# Altium PCB SSR output.PcbDoc
Units mil, origin at the board's own origin, x right, y up, seen from the top; angles counter-clockwise.
Board outline 3421 x 1967 mil, 4 copper layers (Top Layer, Internal Plane 1, Mid-Layer 1, Bottom Layer); 106 components, 73 nets, 419 pads, 0 vias.
Unrouted connection lines stored in the file: 129.
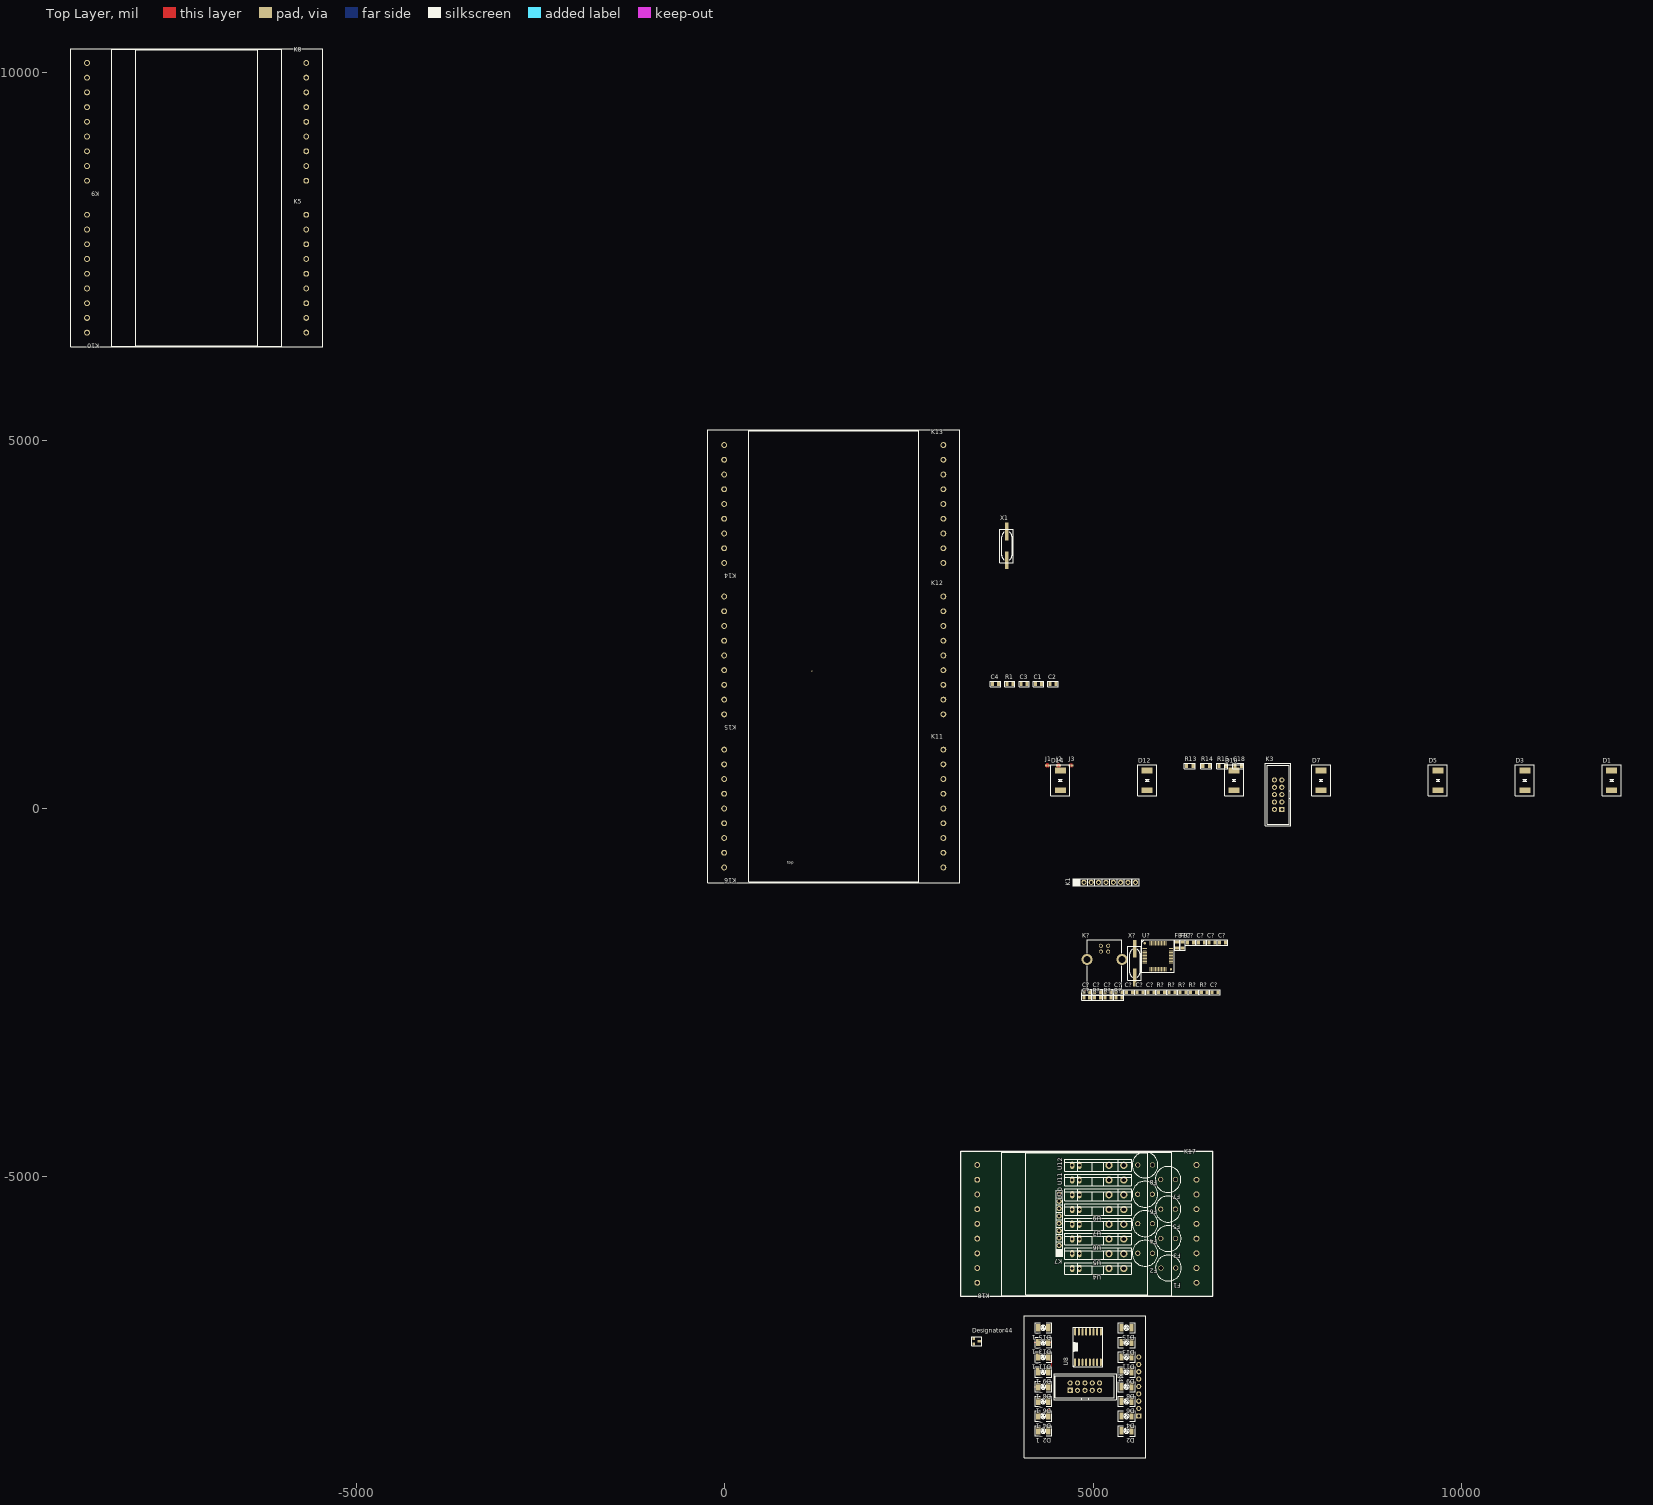
[diagram p0: Top Layer view]
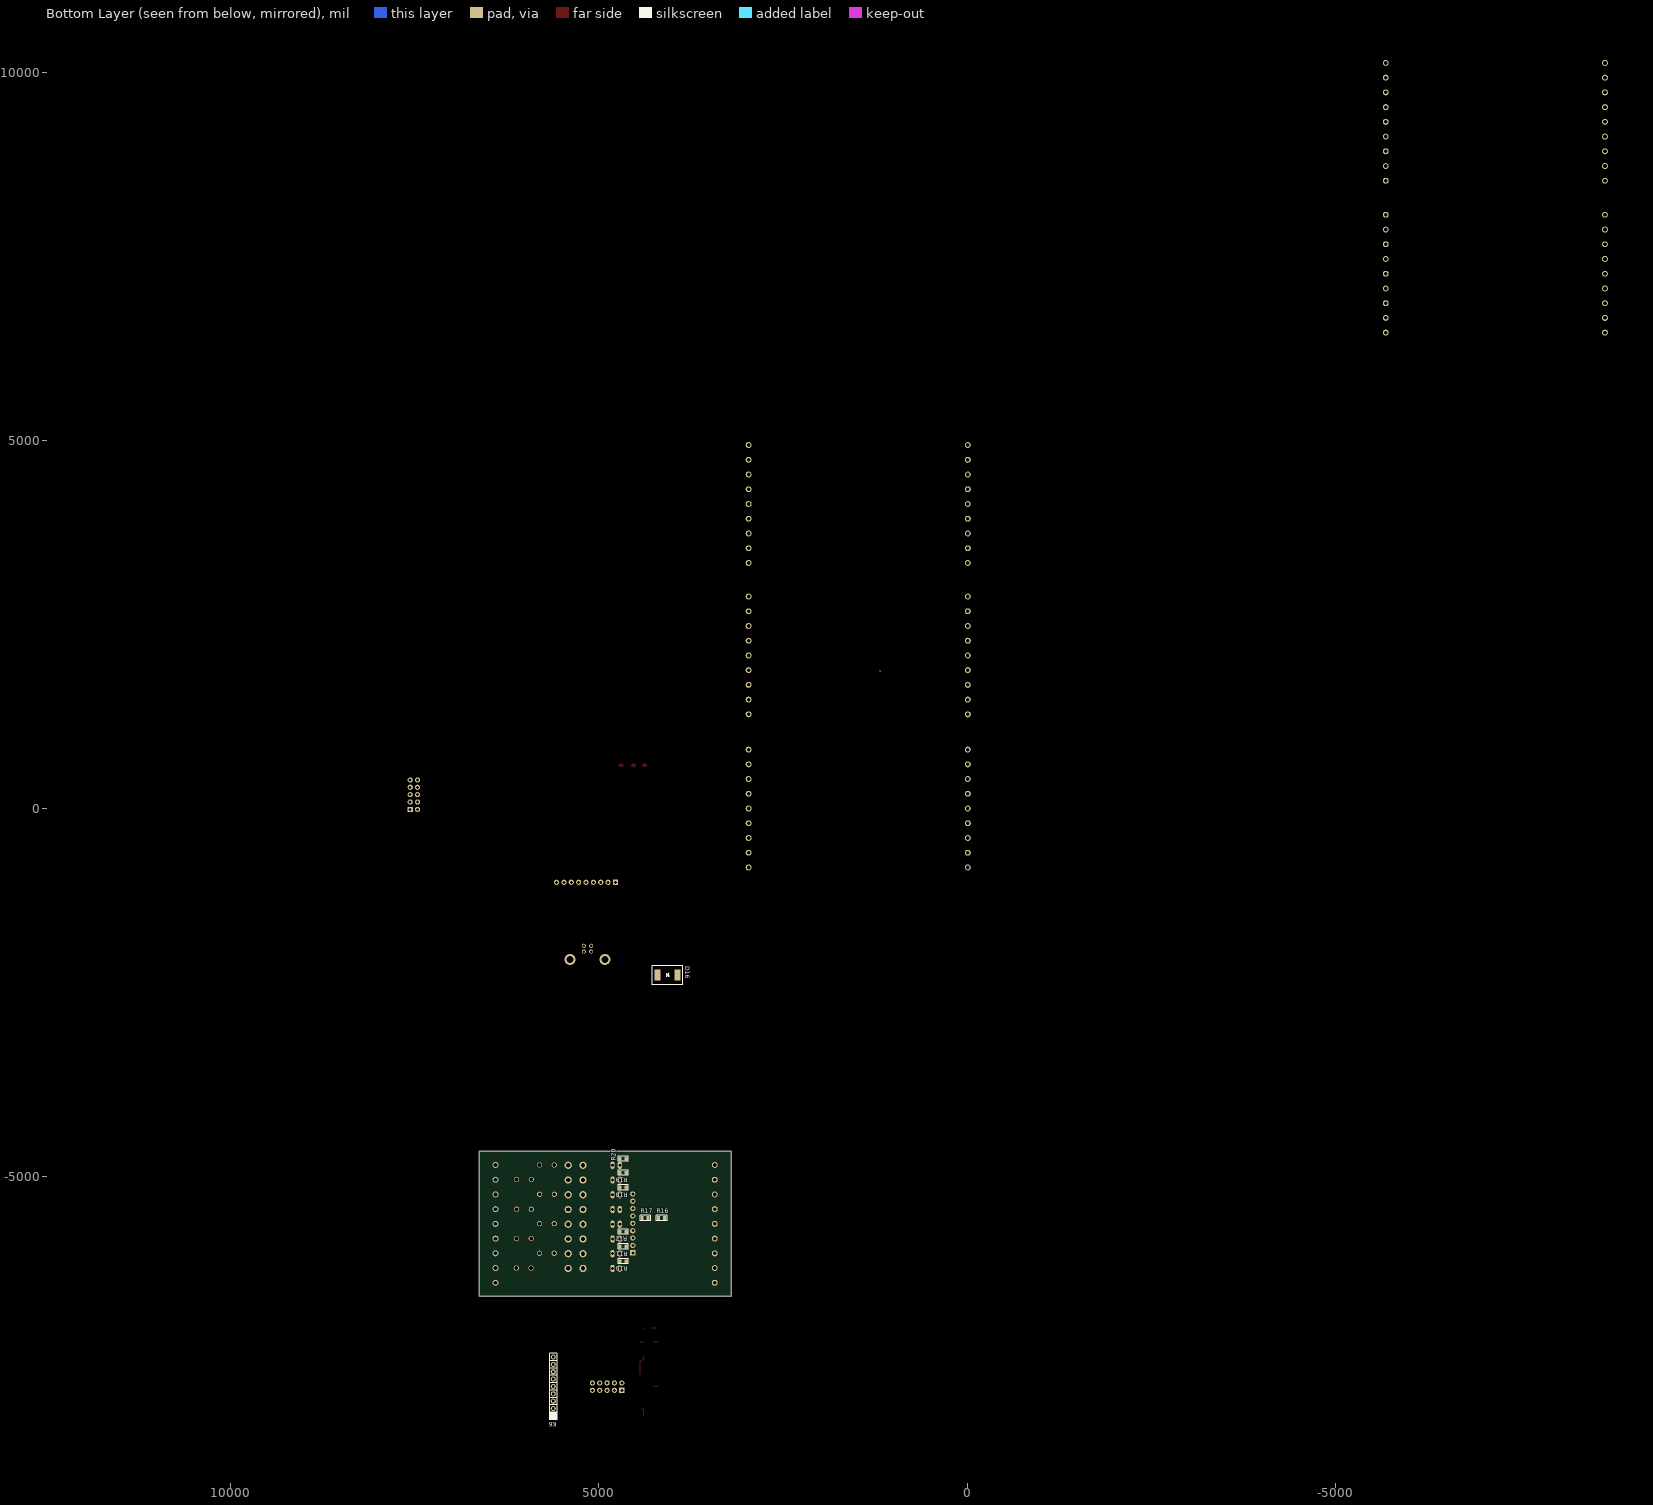
[diagram p1: Bottom Layer view, seen from below]
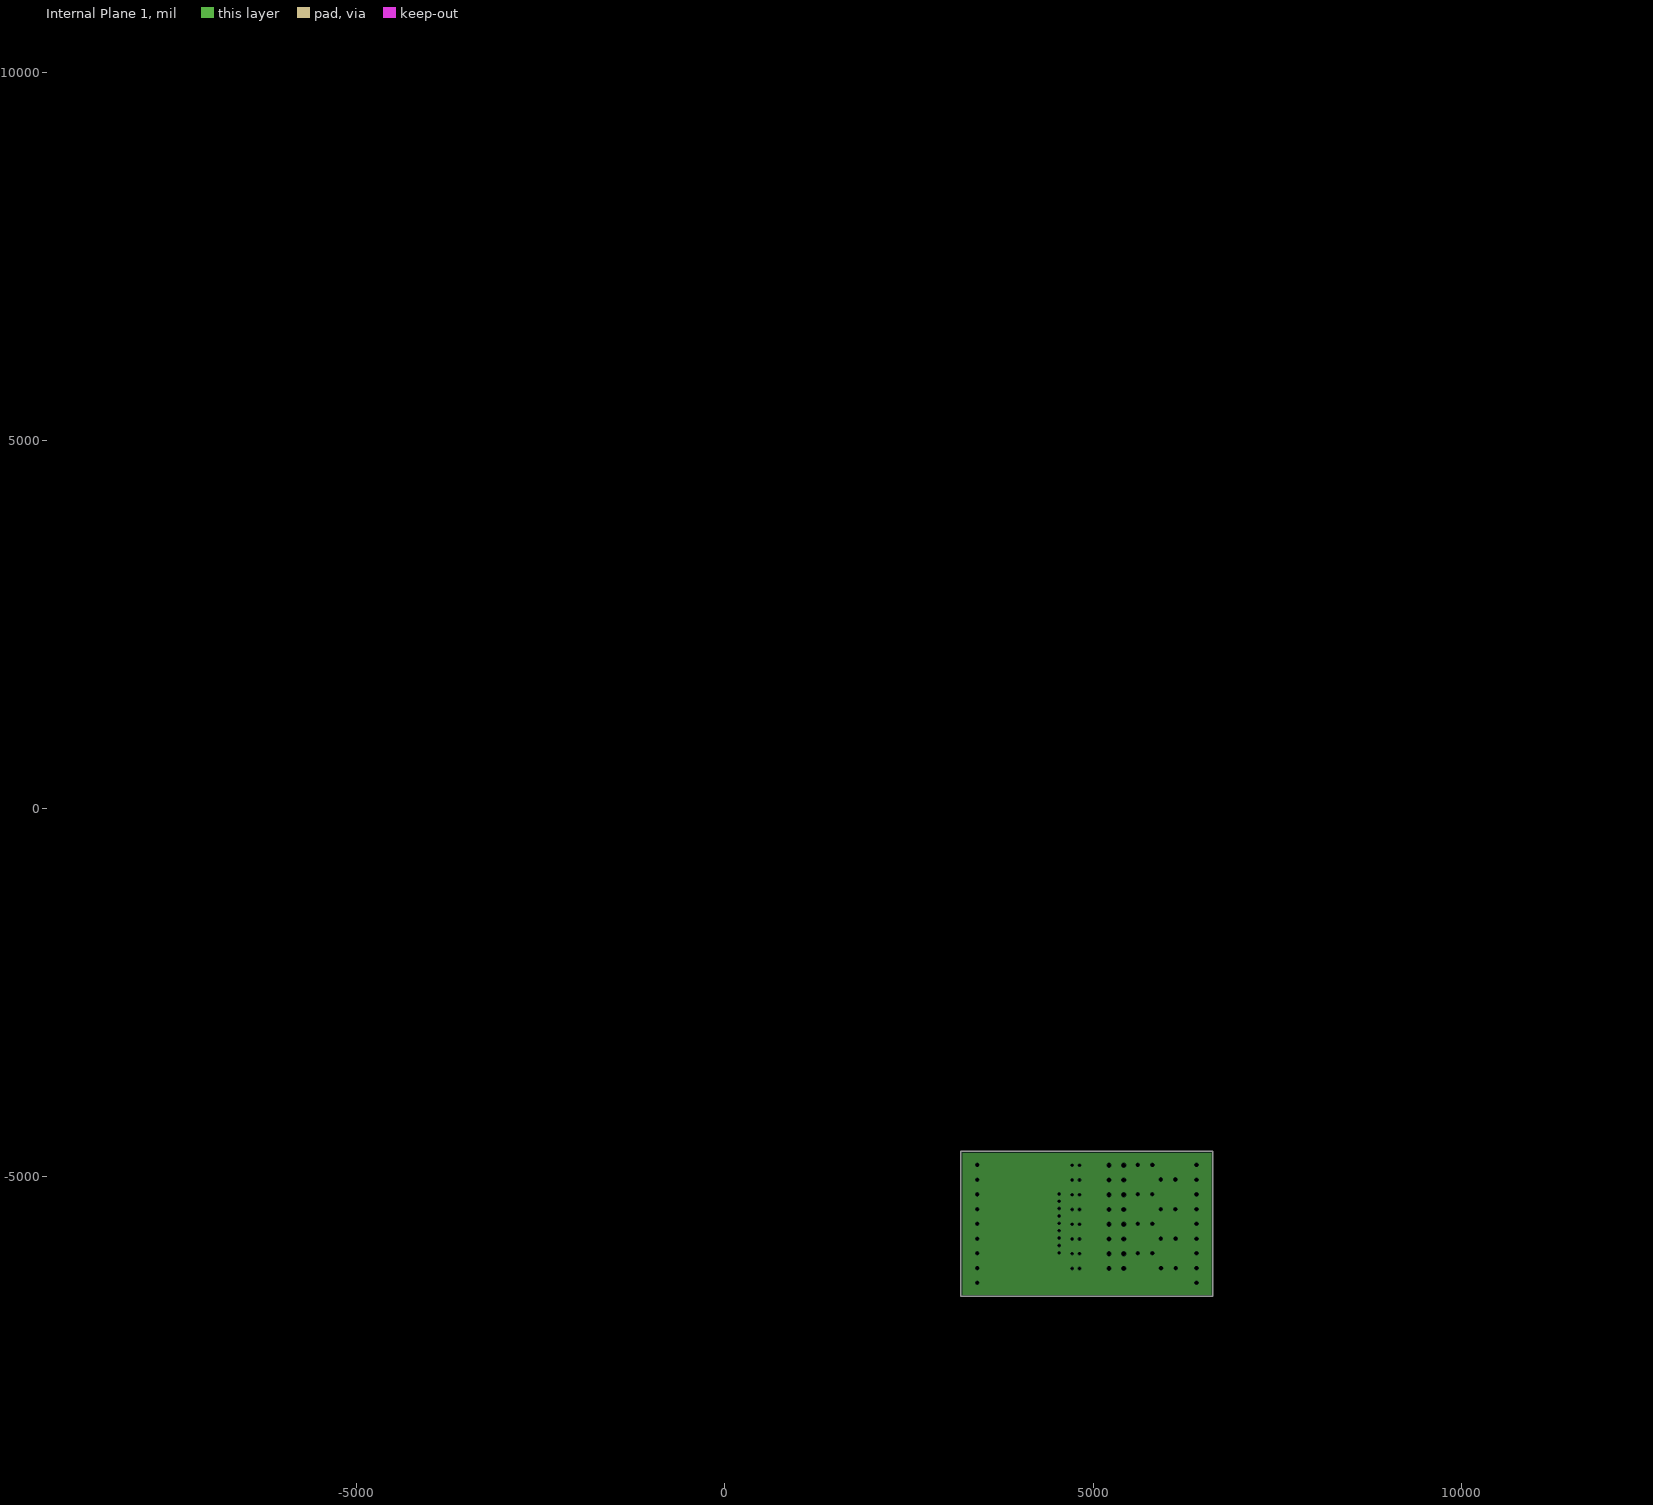
[diagram p2: Internal Plane 1, clearances drawn from the general rule]

## Layer stack, top to bottom
Top Layer: signal copper 1.4
Dielectric: core 12.6, FR-4, Dk 4.8
Internal Plane 1: plane copper 1.4, net GND
Dielectric: prepreg 12.6, FR-4, Dk 4.8
Mid-Layer 1: signal copper 1.4
Dielectric: core 12.6, FR-4, Dk 4.8
Bottom Layer: signal copper 1.4

## Board outline
3205,-6621 3205,-4654 6626,-4654 6626,-6621

## Design rules (kind name [scope] priority, off if disabled: settings)
AssemblyTestPointUsage [All] p1 off:
AssemblyTestpoint [All] p1 off: testpointundercomponent=TRUE minsize=40 maxsize=100 preferedsize=60 minholesize=0 maxholesize=40 preferedholesize=32 testpointgrid=1 usegrid=TRUE gridtolerance=0.01 allowsidetop=TRUE allowsidebottom=TRUE
Clearance "WPLGA Clearance" [(InComponent('U8'))] p1: gap=3.5 // Overall Board clearance : this defines the smallest gap if no other rules are in effect
Clearance "Polygons Mid 1" [(InPolygon)] p2: gap=10 // Rule for polygon clearance on Mid Layer 1
Clearance [All] p3: gap=4
ComponentClearance [All] p1 off: gap=10 collisioncheckmode=3 verticalgap=10 showdistances=FALSE
DiffPairsRouting [All] p1 off: maxlimit=10 minlimit=10 mostfreqgap=10 maxuncoupledlength=500
FabricationTestPointUsage TestPointUsage [All] p1 off: valid=0 allowmultiple=FALSE
FabricationTestpoint Testpoint [All] p1 off: side=3 testpointundercomponent=TRUE minsize=40 maxsize=100 preferedsize=60 minholesize=0 maxholesize=40 preferedholesize=32 testpointgrid=1 allowsidetop=TRUE allowsidebottom=TRUE usegrid=TRUE gridtolerance=0.01
FanoutControl Fanout_BGA [IsBGA] p1 off: bgadir=Out bgaviamode=Centered fanoutstyle=Auto fanoutdirection=Alternating viagrid=1 // Fanout_BGA (Default Rule)
FanoutControl Fanout_LCC [IsLCC] p2 off: bgadir=Out bgaviamode=Centered fanoutstyle=Auto fanoutdirection=Alternating viagrid=1 // Fanout_LCC (Default Rule)
FanoutControl Fanout_SOIC [IsSOIC] p3 off: bgadir=Out bgaviamode=Centered fanoutstyle=Auto fanoutdirection=Alternating viagrid=1 // Fanout_SOIC (Default Rule)
FanoutControl Fanout_Small [(CompPinCount < 5)] p4 off: bgadir=Out bgaviamode=Centered fanoutstyle=Auto fanoutdirection=OutThenIn viagrid=1 // Fanout_Small (Default Rule)
FanoutControl Fanout_Default [All] p5 off: bgadir=Out bgaviamode=Centered fanoutstyle=Auto fanoutdirection=Alternating viagrid=1 // Fanout_Default (Default Rule)
Height [All] p1 off: minheight=0 maxheight=1000 prefheight=500
HoleSize [All] p1: absolutevalues=TRUE maxlimit=500 minlimit=1 maxpercent=80.000 minpercent=20.000
LayerPairs [All] p1 off: enforce=TRUE
MinimumAnnularRing "Minimum Annular Ring" [All] p1: minimumring=5 // This is manufacturing dependent. Sierra = 5. This can go to 4 if needed, but keep 5 if possible
MinimumSolderMaskSliver [All] p1 off: minsoldermaskwidth=10
PasteMaskExpansion [All] p1 off: expansion=0
PlaneClearance [All] p1: clearance=6
PlaneConnect "PlaneConnect GND" [InNet('GND')] p1: planeconnectstyle=Direct reliefexpansion=6 reliefentries=4 reliefconductorwidth=10 reliefairgap=6
PlaneConnect "PlaneConnect GENERIC" [All] p2: planeconnectstyle=Relief reliefexpansion=20 reliefentries=4 reliefconductorwidth=10 reliefairgap=10
PolygonConnect [All] p1: connectstyle=Relief reliefconductorwidth=15 reliefentries=4 polygonreliefangle="45 Angle"
RoutingPriority [All] p1 off: routingpriority=0
RoutingTopology [All] p1 off: topology=Shortest
RoutingVias "Routing Vias" [All] p1: holewidth=10 width=20 viastyle="Through Hole" minholewidth=10 minwidth=20 maxholewidth=80 maxwidth=100 // Generic routing via rules
ShortCircuit "Short Circuit Generic Rule" [All] p1: allowed=FALSE // Short circuit Rule : No shorts allowed
SilkToSilkClearance [All] p1 off: silktosilkclearance=10
SilkscreenOverComponentPads [All] p1 off: minsilkscreentomaskgap=10
SolderMaskExpansion "SolderMask Expansion Via's" [(IsVia)] p1: expansion=-40 // Via's should be painted closed. Set to -40
SolderMaskExpansion "Solder Mask Expansion Generic" [All] p2: expansion=2 // Generic solder mask expansion
UnRoutedNet "Un Routed Net" [All] p1:  // Broken Nets not allowed
Width [(InNetClass('common-6mil'))] p1: maxlimit=6 minlimit=6 preferedwidth=6 minimp=50.000000 maximp=50.000000 favimp=50.000000 // For Common-6MIL class
Width "Generic Width Rules" [All] p2: maxlimit=100 minlimit=3.5 preferedwidth=10 minimp=50.000000 maximp=50.000000 favimp=50.000000 // Generic width rules applicable if no specific rule is in effect
4 further rules are at their usual default settings.

## Classes and differential pairs
component class "SSR output": C18 D1 D2 D3 D4 D5 D6 D7 D8 D9 D10 D11 D12 D13 D14 D15 D16 F1 F2 F3 F4 F5 F6 F7 F8 J1 J2 J3 K3 K4 K5 K6 K7 R10 R11 R12 R13 R14 R15 R16 R17 R18 R19 R20 U4 U5 U6 U7 U8 U9 U10 U11 U12
component class "ArDINo TopLevel": C1 C2 C3 C4 C? FB? K1 K? R1 R? U1 U? X1 X?

## Components (designator, comment, footprint, x,y, rotation, side; value= is the part's Value field where it differs from the comment)
C1 "TBD" 0805C-TBD 4229.48,1691.5 r0 top
C2 "TBD" 0805C-TBD 4424.48,1691.5 r0 top
C3 "TBD" 0805C-TBD 4034.48,1691.5 r0 top
C4 "TBD" 0805C-TBD 3644.48,1691.5 r0 top
C18 "100nF" 0805C 6928,578 r0 top
C? "100nF" 0805C-TBD 6623.98,-2491.29 r0 top
C? "100nF" 0805C-TBD 4883.98,-2566.29 r0 top
C? "100nF" 0805C-TBD 5753.98,-2491.29 r0 top
C? "100nF" 0805C-TBD 6729,-1818 r0 top
C? "TBD" 0805C-TBD 4883.98,-2491.29 r0 top
C? "TBD" 0805C-TBD 6584,-1818 r0 top
C? "TBD" 0805C-TBD 6294,-1818 r0 top
C? "TBD" 0805C-TBD 6439,-1818 r0 top
C? "100nF" 0805C-TBD 5463.98,-2491.29 r0 top
C? "100nF" 0805C-TBD 5608.98,-2491.29 r0 top
C? "100nF" 0805C-TBD 5318.98,-2491.29 r0 top
C? "100nF" 0805C-TBD 5028.98,-2491.29 r0 top
C? "100nF" 0805C-TBD 5173.98,-2491.29 r0 top
D1 "SMCJ220CA" DIODE-SMC 12041,538 r90 top
D2 "TOPLED-GREEN" TOPLED-GREEN 5521.3,-8447.42 r180 top
D2_1 "TOPLED-GREEN" TOPLED-GREEN 4391,-8447 r180 top (schematic designator D2)
D3 "SMCJ220CA" DIODE-SMC 10861,538 r90 top
D4 "TOPLED-GREEN" TOPLED-GREEN 5521.3,-8246.42 r180 top
D4_1 "TOPLED-GREEN" TOPLED-GREEN 4391,-8246 r180 top (schematic designator D4)
D5 "SMCJ220CA" DIODE-SMC 9681,538 r90 top
D6 "TOPLED-GREEN" TOPLED-GREEN 5521.3,-8046.42 r180 top
D6_1 "TOPLED-GREEN" TOPLED-GREEN 4391,-8046 r180 top (schematic designator D6)
D7 "SMCJ220CA" DIODE-SMC 8096,538 r90 top
D8 "TOPLED-GREEN" TOPLED-GREEN 5521.3,-7847.42 r180 top
D8_1 "TOPLED-GREEN" TOPLED-GREEN 4391,-7847 r180 top (schematic designator D8)
D9 "TOPLED-GREEN" TOPLED-GREEN 5521.3,-7646.83 r180 top
D9_1 "TOPLED-GREEN" TOPLED-GREEN 4391,-7646.42 r180 top (schematic designator D9)
D10 "SMCJ220CA" DIODE-SMC 6915,538 r90 top
D11 "TOPLED-GREEN" TOPLED-GREEN 5521.3,-7444.83 r180 top
D11_1 "TOPLED-GREEN" TOPLED-GREEN 4391,-7444.42 r180 top (schematic designator D11)
D12 "SMCJ220CA" DIODE-SMC 5735,538 r90 top
D13 "TOPLED-GREEN" TOPLED-GREEN 5521.3,-7247.42 r180 top
D13_1 "TOPLED-GREEN" TOPLED-GREEN 4391,-7247 r180 top (schematic designator D13)
D14 "SMCJ220CA" DIODE-SMC 4555,538 r90 top
D15 "TOPLED-GREEN" TOPLED-GREEN 5521.3,-7047.83 r180 top
D15_1 "TOPLED-GREEN" TOPLED-GREEN 4391,-7047.42 r180 top (schematic designator D15)
D16 "SMCJ220CA" DIODE-SMC 3914,-2260 r180 bottom
Designator44 "Comment" SOT23-GDS 3378,-7193 r0 top
F1 "FUSE-372SERIES" FUSE-372 6121.73,-6237.58 r180 top
F2 "FUSE-372SERIES" FUSE-372 5805.73,-6036.58 r180 top
F3 "FUSE-372SERIES" FUSE-372 6119.73,-5836.58 r180 top
F4 "FUSE-372SERIES" FUSE-372 5805.73,-5634.58 r180 top
F5 "FUSE-372SERIES" FUSE-372 6117.73,-5437.58 r180 top
F6 "FUSE-372SERIES" FUSE-372 5804.73,-5235.58 r180 top
F7 "FUSE-372SERIES" FUSE-372 6117.73,-5034.58 r180 top
F8 "FUSE-372SERIES" FUSE-372 5805.73,-4837.58 r180 top
FB? "1KZ" 0805FB-1KZ 6139,-1883 r90 top
FB? "1KZ" 0805FB-1KZ 6214,-1883 r90 top
J1 "A2" BYPASS 4360,586 r0 top
J2 "A1" BYPASS 4510,586 r0 top
J3 "A0" BYPASS 4680,586 r0 top
K1 "HEADER-1X9" HEADER-1X9 4775,-1000 r90 top
K3 "DINOBUS" IDC10-B 7562,-10 r90 top
K4 "DINOBUS" IDC10-B 4689,-7897 r0 top
K5 "PRKR-9-5.08MM" PRKR-9-5.08MM -5682.55,6462.52 r90 top
K6 "HEADER-1X9" HEADER-1X9 5620,-8245 r0 bottom
K7 "HEADER-1X9" HEADER-1X9 4540,-6030 r180 top
K8 "PRKR-9-5.08MM" PRKR-9-5.08MM -5682.55,8524.38 r90 top (schematic designator K5)
K9 "PRKR-9-5.08MM" PRKR-9-5.08MM -8658.93,10124.38 r270 top (schematic designator K5)
K10 "PRKR-9-5.08MM" PRKR-9-5.08MM -8658.93,8062.52 r270 top (schematic designator K5)
K11 "PRKR-9-5.08MM" PRKR-9-5.08MM 2967.71,-798.44 r90 top (schematic designator K5)
K12 "PRKR-9-5.08MM" PRKR-9-5.08MM 2967.71,1280.3 r90 top (schematic designator K5)
K13 "PRKR-9-5.08MM" PRKR-9-5.08MM 2967.71,3335.94 r90 top (schematic designator K5)
K14 "PRKR-9-5.08MM" PRKR-9-5.08MM -8.67,4935.95 r270 top (schematic designator K5)
K15 "PRKR-9-5.08MM" PRKR-9-5.08MM -8.67,2880.3 r270 top (schematic designator K5)
K16 "PRKR-9-5.08MM" PRKR-9-5.08MM -8.67,801.56 r270 top (schematic designator K5)
K17 "PRKR-9-5.08MM" PRKR-9-5.08MM 6403.73,-6437.58 r90 top (schematic designator K5)
K18 "PRKR-9-5.08MM" PRKR-9-5.08MM 3427.35,-4837.58 r270 top (schematic designator K5)
K? "USB-B" USB-B 5204.7,-1861.63 r0 top
R1 "10K" 0805R-10K 3839.48,1691.5 r0 top
R10 "330R" 0805R-330 4642,-6143 r0 bottom
R11 "330R" 0805R-330 4644,-5945 r0 bottom
R12 "330R" 0805R-330 4645,-5743 r0 bottom
R13 "10K" 0805R 6269,578 r0 top
R14 "10K" 0805R 6489,578 r0 top
R15 "10K" 0805R 6708,578 r0 top
R16 "330R" 0805R-330 4182,-5558 r180 bottom
R17 "330R" 0805R-330 4402,-5558 r180 bottom
R18 "330R" 0805R-330 4643,-5144 r0 bottom
R19 "330R" 0805R-330 4642,-4944 r0 bottom
R20 "330R" 0805R-330 4642,-4753 r0 bottom
R? "27R" 0805R-27 5028.98,-2566.29 r0 top
R? "27R" 0805R-27 5318.98,-2566.29 r0 top
R? "0R" 0805R-GENERIC 5173.98,-2566.29 r0 top
R? "0R" 0805R-GENERIC 6333.98,-2491.29 r0 top
R? "0R" 0805R-GENERIC 6478.98,-2491.29 r0 top
R? "47K" 0805R-47K 6188.98,-2491.29 r0 top
R? "47K" 0805R-47K 5898.98,-2491.29 r0 top
R? "180R" 0805R-180 6043.98,-2491.29 r0 top
U4 "S202T02" S202T02 5066.61,-6242 r180 top
U5 "S202T02" S202T02 5066.61,-6042 r180 top
U6 "S202T02" S202T02 5066.61,-5842 r180 top
U7 "S202T02" S202T02 5066.61,-5642 r180 top
U8 "PCA9534" SO16W 4756,-7516 r90 top
U9 "S202T02" S202T02 5066.61,-5442 r180 top
U10 "S202T02" S202T02 5066.61,-5242 r180 top
U11 "S202T02" S202T02 5066.61,-5042 r180 top
U12 "S202T02" S202T02 5066.61,-4842 r180 top
U? "VNC1" TQFP48 5702.35,-1878.47 r0 top
X1 "CRYSTAL-GENERIC" XTAL-RU49/4 3829.48,3371.5 r90 top
X? "CRYSTAL-GENERIC" XTAL-RU49/4 5566.99,-2292.5 r90 top

## Footprints (in the part's own frame and the unit in brackets; to place one, negate y for a bottom-side part, rotate by r counter-clockwise, add the part's x,y. Pads: shape width x height; smd on the part's side, far side on the other; paste and mask are expansions set on the pad)
0805C [mm]
  rect 1.1x1.27 smd: 1(0,0) 2(2.286,0)
  silkscreen extent -0.76,-0.89 3.05,0.89, body extent -0.25,-0.64 2.41,0.64, height 0.66
0805C-TBD [mil] "CAPACITOR 0805"
  rect 40x50 smd: 1(-10,0) 2(70,0)
  silkscreen extent -40,-35 100,35, body extent -11,-25 70,25, height 26
0805FB-1KZ [mil] "FERRITE BEAD 0805"
  rect 40x50 smd: 1(-10,0) 2(70,0)
  silkscreen extent -40,-35 100,35, body extent -11,-25 70,25, height 26
0805R [mm]
  rect 1.1x1.27 smd: 1(0,0) 2(2.286,0)
  silkscreen extent -0.76,-0.89 3.05,0.89, body extent 0,-0.64 2.29,0.64, height 0.66
0805R-10K [mil] "RESISTOR 0805"
  rect 40x50 smd: 1(-10,0) 2(70,0)
  silkscreen extent -40,-35 100,35, body extent -11,-25 70,25, height 27
0805R-27 [mil] "RESISTOR 0805"
  rect 40x50 smd: 1(-10,0) 2(70,0)
  silkscreen extent -40,-35 100,35, body extent -11,-25 70,25, height 27
0805R-47K [mil] "RESISTOR 0805"
  rect 40x50 smd: 1(-10,0) 2(70,0)
  silkscreen extent -40,-35 100,35, body extent -11,-25 70,25, height 27
0805R-180 [mil] "RESISTOR 0805"
  rect 40x50 smd: 1(-10,0) 2(70,0)
  silkscreen extent -40,-35 100,35, body extent -11,-25 70,25, height 27
0805R-330 [mil] "RESISTOR 0805"
  rect 40x50 smd: 1(-10,0) 2(70,0)
  silkscreen extent -40,-35 100,35, body extent -11,-25 70,25, height 27
0805R-GENERIC [mil] "RESISTOR 0805"
  rect 40x50 smd: 1(-10,0) 2(70,0)
  silkscreen extent -40,-35 100,35, body extent -11,-25 70,25, height 27
BYPASS [mil]
  rect 30x30 smd mask+4: 1(0,0) 2(38,0)
  Top Layer lines w8: 10.83,-20.43 cw(c19,0) 10.83,20.43 10.83,-20.43 ; 27.17,-20.43 ccw(c19,0) 38,-11.09 ccw(c19,0) 40.98,-1 ccw(c19,0) 27.17,20.43 27.17,0 27.17,-20.43
DIODE-SMC [mil]
  rect 80x150 smd: A(-19.68,0) K(-288.74,0)
  silkscreen extent -365,-130 55,130, body extent -312,-122 -3,122, height 88
FUSE-372 [mil]
  round 70 hole 50 unplated mask+2: 1(0,0) 2(200,0)
  silkscreen extent -75,-175 275,175, body extent -66,-167 267,167, height 315
HEADER-1X9 [mil]
  rect 70x70 hole 40: 1(0,0)
  round 70 hole 40: 2(0,-100) 3(0,-200) 4(0,-300) 5(0,-400) 6(0,-500) 7(0,-600) 8(0,-700) 9(0,-800)
  silkscreen extent -50,-850 50,50, body extent -50,-850 50,50, height 470
IDC10-B [mil]
  rect 70x70 hole 40: 1(0,0)
  round 70 hole 40: 2(0,100) 3(100,0) 4(100,100) 5(200,0) 6(200,100) 7(300,0) 8(300,100) 9(400,0) 10(400,100)
  silkscreen extent -225,-125 625,225, body extent -225,-125 625,225, height 358
PRKR-9-5.08MM [mil]
  round 80 hole 50 unplated mask+2: 1(0,0) 2(200,0) 3(400,0) 4(600,0) 5(800,0) 6(1000,0) 7(1200,0) 8(1400,0) 9(1600,0)
  body extent -100,-177 1720,177, height 598
S202T02 [mm]
  oval 1.5x2.5 hole 1 unplated mask+0.051: A(6.4,0) K(8.9,0)
  round 2.5 hole 1.5 unplated mask+0.051: AC1(-8.9,0) AC2(-3.8,0)
  silkscreen extent -11.5,-2 11.5,2, body extent -11.5,-2 11.5,2, height 20
SO16W [mil]
  rect 100x28 smd: 1(0,0)
  oval 100x28 smd: 2(0,-50) 3(0,-100) 4(0,-150) 5(0,-200) 6(0,-250) 7(0,-300) 8(0,-350) 9(413,-350) 10(413,-300) 11(413,-250) 12(413,-200) 13(413,-150) 14(413,-100) 15(413,-50) 16(413,0)
  silkscreen extent -60,-375 473,25, body extent 5,-375 407,27, height 61
SOT23-GDS [mil]
  rect 50x36 smd: D(80,-38)
  rect 36x36 smd: G(0,0) S(0,-75)
  silkscreen extent -25,-100 110,25, body extent -3,-95 94,20, height 41
TOPLED-GREEN [mil]
  rect 60x100 smd: A(0,0) K(135,0)
  silkscreen extent -50,-70 185,70, body extent -20,-60 154,60, height 75
TQFP48 [mm]
  rect 1.5x0.3 smd: 1(-0.025,-0.45)
  oval 1.5x0.3 smd: 2(-0.025,-0.95) 3(-0.025,-1.45) 4(-0.025,-1.95) 5(-0.025,-2.45) 6(-0.025,-2.95) 7(-0.025,-3.45) 8(-0.025,-3.95) 9(-0.025,-4.45) 10(-0.025,-4.95) 11(-0.025,-5.45) 12(-0.025,-5.95) 25(9.05,-5.95) 26(9.05,-5.45) 27(9.05,-4.95) 28(9.05,-4.45) 29(9.05,-3.95) 30(9.05,-3.45) 31(9.05,-2.95) 32(9.05,-2.45) 33(9.05,-1.95) 34(9.05,-1.45) 35(9.05,-0.95) 36(9.05,-0.45)
  oval 0.3x1.5 smd: 13(1.75,-7.675) 14(2.25,-7.675) 15(2.75,-7.675) 16(3.25,-7.675) 17(3.75,-7.675) 18(4.25,-7.675) 19(4.75,-7.675) 20(5.25,-7.675) 21(5.75,-7.675) 22(6.25,-7.675) 23(6.75,-7.675) 24(7.25,-7.675) 37(7.25,1.3) 38(6.75,1.3) 39(6.25,1.3) 40(5.75,1.3) 41(5.25,1.3) 42(4.75,1.3) 43(4.25,1.3) 44(3.75,1.3) 45(3.25,1.3) 46(2.75,1.3) 47(2.25,1.3) 48(1.75,1.3)
  round 0.8 smd: M1(0,1.3) M2(9,-7.7)
  silkscreen extent -1.02,-8.67 10.07,2.42, body extent -0.25,-7.9 9.27,1.55, height 0.99
USB-B [mil]
  round 55 hole 35: 1(0,0) 2(-98.42,0) 3(-98.42,-78.74) 4(0,-78.74)
  round 150 hole 90.55: 5(-286.22,-185.43) 6(187.8,-185.43)
  silkscreen extent -285,-590 187,79, body extent -343,-590 243,80, height 437
XTAL-RU49/4 [mil]
  rect 240x47.24 smd: 1(0,0) 2(390,0)
  silkscreen extent -35,-90 425,95, body extent -78,-90 468,95, height 120

## Part data
C1 C2 C3 C4 C? C? C? C?: library part 0805C-TBD, "CAPACITOR 0805 CERAMIC VALUE TO BE DETERMINED"
C18: library part 0805C-100NF, "CAPACITOR NONPOLARISED"
C? C? C? C? C? C? C? C? C?: library part 0805C-100nF-25V-X7R-MUR, "CAPACITOR 0805 CERAMIC"
D1 D3 D5 D7 D10 D12 D14 D16: "Transient Surpression Diode TVS"
F1 F2 F3 F4 F5 F6 F7 F8: "FUSE-372"
FB? FB?: library part 0805FB-1KZ, "FERRITE BEAD 1000 OHM 6A"
J1 J2 J3: library part BYPASS
K3 K4: "BOXHEADER 10 PIN"
K?: "USB B DEVICE CONNECTOR"
R1: library part 0805R-10K, "RESISTOR 0805 1/4 WATT THIN FILM"
R10 R11 R12 R16 R17 R18 R19 R20: library part 0805R-330, "RESISTOR 0805 1/4 WATT THIN FILM"
R13 R14 R15: library part 0805R-10K, "RESISTOR VALUE AS INDICATED"
R? R?: library part 0805R-27, "RESISTOR 0805 1/4 WATT THIN FILM"
R? R? R?: library part 0805R-0R, "RESISTOR 0805 1 WATT"
R? R?: library part 0805R-47K, "RESISTOR 0805 1/4 WATT THIN FILM"
R?: library part 0805R-180, "RESISTOR 0805 1/4 WATT THIN FILM"
U8: "OCTAL PUSH PULL DRIVER I2C"
U?: "VINCULUM USB HOST CONTROLLER"
X1 X?: "GENERIC CRYSTAL"

## Free pads (board coordinates)
  round 20 on Mech1 mask+2: 0(721,-488) 0(747,1721)
  round 20 hole 10 unplated mask+2: 0(1178,1867)

## Nets (pads, with @x,y where several pads share a name; then routed paths per layer and width w, separated by ;. In a path a pad name is that pad's centre, name@x,y a point inside that pad or via, vN(x,y) a via of type N, cw(c..) or ccw(c..) an arc to the next point about the centre after c; other vN are vias at no path point)
GND: C1.1 C2.1 C4.2 C18.2 D8_1.A D9_1.A J1.2 J2.2 J3.2 K3.3 K3.4 K4.3 K4.4 U8.8 U?.1 U?.6 U?.8 U?.9 U?.15 U?.24 U?.27 U?.39
Net_2: U?.29
Net_3: U?.28
NetC1_2: C1.2 X1.1
NetC2_2: C2.2 X1.2
NetC3_2: C3.2 C4.1 R1.2
NetC18_1: C18.1 K3.5 K3.6 K4.5 K4.6 K6.9 R13.2 R14.2 R15.2 U8.16
NetC?_1: C?.1@6613.98,-2491.29
NetC?_2: C?.2@6693.98,-2491.29 U?.5 X?.2
NetD1_K: D1.K F1.2 U4.AC1
NetD2_A: D2.A K6.1
NetD2_K: D2.K U8.4
NetD3_K: D3.K F2.2 U5.AC1
NetD4_A: D4.A K6.2
NetD4_K: D4.K U8.5
NetD5_K: D5.K F3.2 U6.AC1
NetD6_A: D6.A K6.3
NetD6_K: D6.K U8.6
NetD7_K: D7.K F4.2 U7.AC1
NetD8_A: D8.A K6.4
NetD8_K: D8.K U8.7
NetD9_A: D9.A K6.5
NetD9_K: D9.K U8.9
NetD10_K: D10.K F5.2 U9.AC1
NetD11_A: D11.A K6.6
NetD11_K: D11.K U8.10
NetD12_K: D12.K F6.2 U10.AC1
NetD13_A: D13.A K6.7
NetD13_K: D13.K U8.11
NetD14_K: D14.K F7.2 U11.AC1
NetD15_A: D15.A K6.8
NetD15_K: D15.K U8.12
NetD16_K: D16.K F8.2 U12.AC1
NetF1_1: F1.1 K5.2
NetF2_1: F2.1 K5.3
NetF3_1: F3.1 K5.4
NetF4_1: F4.1 K5.5
NetF5_1: F5.1 K5.6
NetF6_1: F6.1 K5.7
NetF7_1: F7.1 K5.8
NetF8_1: F8.1 K5.9
NetFB?_1: FB?.1@6139,-1893 K?.1
NetJ1_1: J1.1 R13.1 U8.3
NetJ2_1: J2.1 R14.1 U8.2
NetJ3_1: J3.1 R15.1 U8.1
NetK3_1: K3.1 K3.2 K4.1 K4.2
NetK3_7: K3.7 K4.7
NetK3_8: K3.8 K4.8
NetK3_9: K3.9 K4.9 U8.15
NetK3_10: K3.10 K4.10 U8.14
NetK5_1: K5.1 U4.AC2 U5.AC2 U6.AC2 U7.AC2 U9.AC2 U10.AC2 U11.AC2 U12.AC2
NetK7_1: K7.1 R10.1
NetK7_2: K7.2 R11.1
NetK7_3: K7.3 R12.1
NetK7_4: K7.4 R16.1
NetK7_5: K7.5 R17.1
NetK7_6: K7.6 R18.1
NetK7_7: K7.7 R19.1
NetK7_8: K7.8 R20.1
NetK7_9: K7.9 U4.A U5.A U6.A U7.A U9.A U10.A U11.A U12.A
NetK?_2: K?.2
NetK?_3: K?.3
NetR10_2: R10.2 U4.K
NetR11_2: R11.2 U5.K
NetR12_2: R12.2 U6.K
NetR16_2: R16.2 U7.K
NetR17_2: R17.2 U9.K
NetR18_2: R18.2 U10.K
NetR19_2: R19.2 U11.K
NetR20_2: R20.2 U12.K
NetR?_1: R?.1@5018.98,-2566.29 U?.7
NetR?_2: R?.2@5098.98,-2566.29 U?.10
NetU?_2: U?.2 U?.17 U?.30 U?.40
pads on no net: C3.1 C?.1@4873.98,-2491.29 C?.1@4873.98,-2566.29 C?.1@5018.98,-2491.29 C?.1@5163.98,-2491.29 C?.1@5308.98,-2491.29 C?.1@5453.98,-2491.29 C?.1@5598.98,-2491.29 C?.1@5743.98,-2491.29 C?.1@6284,-1818 C?.1@6429,-1818 C?.1@6574,-1818 C?.1@6719,-1818 C?.2@4953.98,-2491.29 C?.2@4953.98,-2566.29 C?.2@5098.98,-2491.29 C?.2@5243.98,-2491.29 C?.2@5388.98,-2491.29 C?.2@5533.98,-2491.29 C?.2@5678.98,-2491.29 C?.2@5823.98,-2491.29 C?.2@6364,-1818 C?.2@6509,-1818 C?.2@6654,-1818 C?.2@6799,-1818 D1.A D2_1.A D2_1.K D3.A D4_1.A D4_1.K D5.A D6_1.A D6_1.K D7.A D8_1.K D9_1.K D10.A D11_1.A D11_1.K D12.A D13_1.A D13_1.K D14.A D15_1.A D15_1.K D16.A Designator44.D Designator44.G Designator44.S FB?.1@6214,-1893 FB?.2 K1.1 K1.2 K1.3 K1.4 K1.5 K1.6 K1.7 K1.8 K1.9 K8.1 K8.2 K8.3 K8.4 K8.5 K8.6 K8.7 K8.8 K8.9 K9.1 K9.2 K9.3 K9.4 K9.5 K9.6 K9.7 K9.8 K9.9 K10.1 K10.2 K10.3 K10.4 K10.5 K10.6 K10.7 K10.8 K10.9 K11.1 K11.2 K11.3 K11.4 K11.5 K11.6 K11.7 K11.8 K11.9 K12.1 K12.2 K12.3 K12.4 K12.5 K12.6 K12.7 K12.8 K12.9 K13.1 K13.2 K13.3 K13.4 K13.5 K13.6 K13.7 K13.8 K13.9 K14.1 K14.2 K14.3 K14.4 K14.5 K14.6 K14.7 K14.8 K14.9 K15.1 K15.2 K15.3 K15.4 K15.5 K15.6 K15.7 K15.8 K15.9 K16.1 K16.2 K16.3 K16.4 K16.5 K16.6 K16.7 K16.8 K16.9 K17.1 K17.2 K17.3 K17.4 K17.5 K17.6 K17.7 K17.8 K17.9 K18.1 K18.2 K18.3 K18.4 K18.5 K18.6 K18.7 K18.8 K18.9 K?.4 K?.5 K?.6 R1.1 R?.1@5163.98,-2566.29 R?.1@5308.98,-2566.29 R?.1@5888.98,-2491.29 R?.1@6033.98,-2491.29 R?.1@6178.98,-2491.29 R?.1@6323.98,-2491.29 R?.1@6468.98,-2491.29 R?.2@5243.98,-2566.29 R?.2@5388.98,-2566.29 R?.2@5968.98,-2491.29 R?.2@6113.98,-2491.29 R?.2@6258.98,-2491.29 R?.2@6403.98,-2491.29 R?.2@6548.98,-2491.29 U8.13 U?.3 U?.4 U?.11 U?.12 U?.13 U?.14 U?.16 U?.18 U?.19 U?.20 U?.21 U?.22 U?.23 U?.25 U?.26 U?.31 U?.32 U?.33 U?.34 U?.35 U?.36 U?.37 U?.38 U?.41 U?.42 U?.43 U?.44 U?.45 U?.46 U?.47 U?.48 U?.M1 U?.M2 X?.1
copper on no net: | length 606.7
  Top Layer w8: 4199.7,-7247 4256,-7247 ; 4201.7,-7847 4256,-7847 ; 4225,-7054.58 4285.72,-7054.58 ; 4250.42,-7053 4256,-7047.42 ; 4391,-8246 4391,-8165.7 4411.11,-8145.58 ; 4391,-8046 4391.42,-8045.58 ; 4391,-7444.42 4391,-7465.3 4437.7,-7512 4437.7,-7677.58 ; 4391,-7247 4435.7,-7247 ; 4391,-7068.3 4391,-7047.42

## Polygon pours and split planes (outlines as drawn)
GND on Internal Plane 1 (split plane): 6605.9,-6600.9 3225.1,-6600.9 3225.1,-4674.1 6605.9,-4674.1

## Silkscreen, mask and mechanical layers (free items; w line width, h text height)
Top Overlay:
  lines w1: -8880,6270 -5459,6270 -5459,10317 -8880,10317 -8880,6270 ; -8325,6276 -8325,10311 -6014,10311 -6014,6276 -8325,6276 ; -7996,6286 -7996,10301 -6343,10301 -6343,6286 -7996,6286 ; -231,-1006 -231,5143 3190,5143 3190,-1006 -231,-1006 ; 324,-992 324,5130 2635,5130 2635,-992 324,-992 ; 3205,-6621 3205,-4654 6626,-4654 6626,-6621 3205,-6621 ; 3760,-6612 3760,-4663 6071,-4663 6071,-6612 3760,-6612 ; 4063,-8811 4063,-6882 5716,-6882 5716,-8811 4063,-8811 ; 4089,-6602 5742,-6602 5742,-4673 4089,-4673 4089,-6602
  text "top" at 851,-747 h40
Mechanical 1:
  lines w1: 3829,-6036.58 6402.73,-6036.58 ; 3970,-6437.58 6403.73,-6437.58 ; 3970,-6237.58 6403.73,-6237.58 ; 3981,-5235.58 6401.73,-5235.58 ; 3989,-5836.58 6402.73,-5836.58 ; 4039,-5637.58 6403.73,-5637.58 ; 4039,-4837.58 6403.73,-4837.58 ; 4041,-5037.58 6403.73,-5037.58 ; 4074,-5437.58 6403.73,-5437.58
  lines w10: -263.48,-3220.96 -263.48,2928.64 -261.52,2930.6 3155.81,2930.6 3155.81,-3222.93 3153.84,-3220.96 -263.48,-3220.96 ; -237.48,-1011.96 3179.84,-1011.96 3181.81,-1013.93 3181.81,5139.6 -235.52,5139.6 -237.48,5137.64 -237.48,-1011.96
Mechanical 2:
  lines w1: 4063,-8669 4063,-8666 4208,-8666 ; 4063,-8646.58 5716,-8646.58 ; 4063,-8446.58 5716,-8446.58 ; 4063,-8245.58 5716,-8245.58 ; 4063,-8045.58 5716,-8045.58 ; 4063,-7846.58 5716,-7846.58 ; 4063,-7646.58 5716,-7646.58 ; 4063,-7444.58 5716,-7444.58 ; 4063,-7246.58 5716,-7246.58 ; 4063,-7046.58 5716,-7046.58 ; 4063,-7027 4208,-7027 ; 4063,-6921 4063,-6882 ; 4092,-8666 4063,-8695 4063,-8724 ; 4092,-7027 4063,-6998 4063,-6969 ; 4102,-8811 4063,-8811 ; 4121,-8666 4063,-8724 ; 4121,-7027 4063,-6969 ; 4150,-8666 4063,-8753 ; 4150,-7027 4063,-6940 ; 4151,-8811 4151,-8723 ; 4151,-8671 4151,-6970 ; 4151,-8518 4206.11,-8518 ; 4158,-6970 5628,-6970 ; 4179,-8666 4063,-8782 ; 4179,-7027 4063,-6911 ; 4205,-6882 4208,-6882 4208,-7027 ; 4208,-8811 4208,-8666 ; 4208,-8782 4179,-8811 4150,-8811 ; 4208,-8753 4150,-8811 ; 4208,-8724 4121,-8811 ; 4208,-8695 4092,-8811 ; 4208,-6998 4092,-6882 ; 4208,-6969 4121,-6882 ; 4208,-6940 4150,-6882 ; 4208,-6911 4179,-6882 4150,-6882 ; 4889.5,-8811 4889.5,-8097.5 4889.5,-7846.5 ; 5571,-8782 5600,-8811 5629,-8811 ; 5571,-8753 5629,-8811 ; 5571,-8724 5658,-8811 ; 5571,-8695 5687,-8811 ; 5571,-6998 5687,-6882 ; 5571,-6969 5658,-6882 ; 5571,-6940 5629,-6882 ; 5571,-6911 5600,-6882 5629,-6882 ; 5571,-6882 5571,-7027 ; 5571.3,-8517.42 5572.89,-8519 ; 5574,-8811 5571,-8811 5571,-8666 ; 5600,-8666 5716,-8782 ; 5600,-7027 5716,-6911 ; 5628,-8641 5628,-8723 ; 5629,-8666 5716,-8753 ; 5629,-7027 5716,-6940 ; 5658,-8666 5716,-8724 ; 5658,-7027 5716,-6969 ; 5677,-6882 5716,-6882 ; 5687,-8666 5716,-8695 5716,-8724 ; 5687,-7027 5716,-6998 5716,-6969 ; 5716,-8772 5716,-8811 ; 5716,-8666 5571,-8666 ; 5716,-7024 5716,-7027 5571,-7027 ; 4063,-8811 5716,-6882 ; 4063,-8811 4063,-6882 ; 4063,-8811 5716,-8811 ; 4063,-8811 4092,-8811 ; 4063,-8811 4063,-8782 ; 4063,-8811 4208,-8666 ; 4063,-8782 4063,-8753 ; 4063,-8753 4063,-8724 ; 4063,-6969 4063,-6940 ; 4063,-6940 4063,-6911 ; 4063,-6911 4063,-6882 ; 4063,-6882 5716,-8811 ; 4063,-6882 5716,-6882 ; 4063,-6882 5716,-6882 ; 4063,-6882 4208,-7027 ; 4063,-6882 4092,-6882 ; 4092,-8811 4121,-8811 ; 4092,-6882 4121,-6882 ; 4121,-8811 4150,-8811 ; 4121,-6882 4150,-6882 ; 4151,-8723 5628,-8723 ; 4151,-8723 4151,-6970 ; 4151,-8723 5628,-8723 ; 4151,-6970 5628,-6970 ; 5571,-8666 5716,-8811 ; 5571,-7027 5716,-6882 ; 5628,-8723 5628,-6970 ; 5629,-8811 5658,-8811 ; 5629,-6882 5658,-6882 ; 5658,-8811 5687,-8811 ; 5658,-6882 5687,-6882 ; 5687,-8811 5716,-8811 ; 5687,-6882 5716,-6882 ; 5716,-8811 5716,-6882 ; 5716,-8811 5716,-8782 ; 5716,-8782 5716,-8753 ; 5716,-8753 5716,-8724 ; 5716,-6969 5716,-6940 ; 5716,-6940 5716,-6911 ; 5716,-6911 5716,-6882
  text "NOGO" at 4113,-6928 h15 r315
  text "PLEXIBORDER" at 4738,-6943 h15
  text "NOGO" at 5620,-6973 h15 r45
  text "SCREW" at 4071,-7066 h15
  text "SCREW" at 4070,-7268 h15
  text "SCREW" at 4071,-7466 h15
  text "SCREW" at 4069,-7666 h15
  text "SCREW" at 4070,-7838.58 h15
  text "PLEXIBORDER" at 5702,-8016 h15 r90
  text "PLEXIBORDER" at 4137,-8030 h15 r90
  text "SCREW" at 4073,-8065 h15
  text "SCREW" at 4072,-8265 h15
  text "SCREW" at 4069,-8467 h15
  text "SCREW" at 4071,-8643 h15
  text "NOGO" at 5596,-8713 h15 r315
  text "PLEXIBORDER" at 4707,-8784 h15
  text "NOGO" at 4109,-8786 h15 r45